# Altium PCB Lora_PCB.PcbDoc
Units mm, origin at the board's own origin, x right, y up, seen from the top; angles counter-clockwise.
Board outline 87.88 x 21.08 mm, 2 copper layers (Top Layer, Bottom Layer); 30 components, 40 nets, 129 pads, 4 vias.
Unrouted connection lines stored in the file: 50.
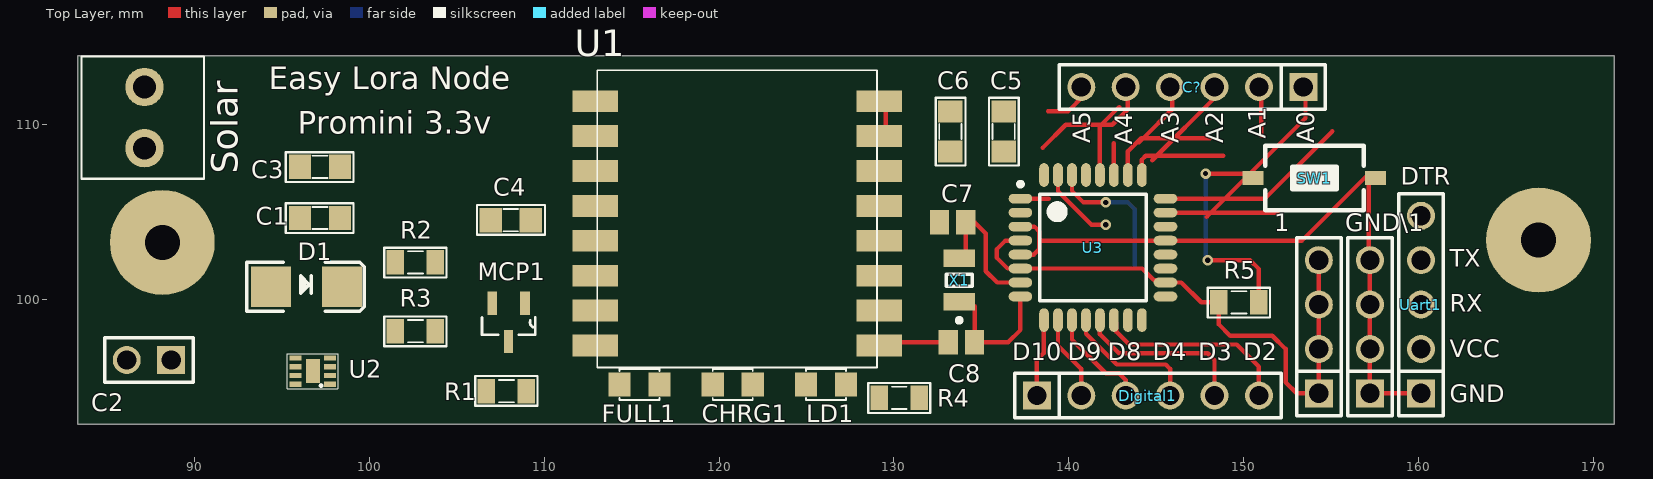
[diagram p0: Top Layer view]
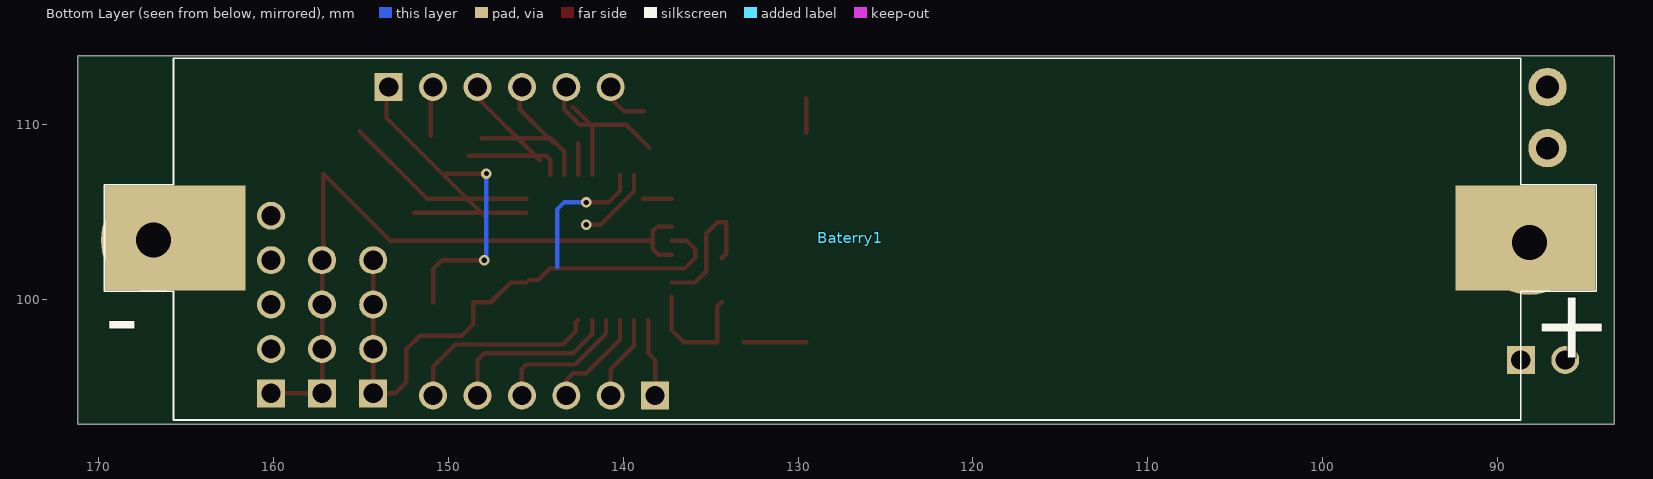
[diagram p1: Bottom Layer view, seen from below]

## Layer stack, top to bottom
Top Solder: solder mask 0.0102, Solder Resist, Dk 3.5
Top Layer: signal copper 0.0356
Dielectric 1: dielectric 0.32, FR-4, Dk 4.8
Bottom Layer: signal copper 0.0356
Bottom Solder: solder mask 0.0102, Solder Resist, Dk 3.5

## Board outline
83.312,92.837 171.196,92.837 171.196,113.919 83.312,113.919

## Design rules (kind name [scope] priority, off if disabled: settings)
Clearance [All] p1: gap=0.254 ignorepadtopadclearanceinfootprint=FALSE except(0: Arc-Hole Track-Hole SMDPad-Hole THPad-Hole Via-Hole Fill-Hole Poly-Hole Region-Hole Text-Hole)
PolygonConnect [All] p1: connectstyle=Relief reliefconductorwidth=0.254 reliefentries=4 polygonreliefangle="90 Angle" airgapwidth=0.254
RoomDefinition Schematic [InComponentClass('Schematic')] p1: confinementstyle=ConfineIn formatcopy=TRUE lockcomponents=FALSE outline 0,0 50.8,0 50.8,25.4 0,25.4
RoutingVias [All] p1: holewidth=0.3 width=0.6 viastyle="Through Hole" minholewidth=0.3 minwidth=0.6 maxholewidth=0.3 maxwidth=0.6
SolderMaskExpansion [All] p1: expansion=0.102
Width [All] p1: maxlimit=0.254 minlimit=0.254 preferedwidth=0.254
30 further rules are at their usual default settings.

## Components (designator, comment, footprint, x,y, rotation, side; value= is the part's Value field where it differs from the comment)
1 "JP4" JP4-D1T 154.305,94.615 r90 top
Baterry1 "18650 Baterry" "18650 Baterry" 88.646,113.792 r0 bottom
C1 "22uF" CAP_0805 97.155,104.648 r0 top value=33p
C2 "JP2" JP2-D1T 88.646,96.52 r180 top
C3 "4.7uF" CAP_0805 97.155,107.569 r0 top value=33p
C4 "1uF" CAP_0805 108.077,104.521 r180 top value=33p
C5 "0.1uF" CAP_0805 136.271,109.601 r90 top
C6 "0.1uF" CAP_0805 133.223,109.601 r90 top value=33p
C7 "100pF" C0805 133.35,104.394 r180 top value=33p
C8 "100pF" C0805 133.858,97.536 r180 top value=33p
C? "JP6" JP6-D1T 153.416,112.141 r180 top
CHRG1 "LED" LED-0805-Red 121.92,95.123 r180 top value="LED 3 - 5 ly 2 Colour"
D1 "S1g" DIO-SMD-106 96.393,100.711 r180 top value=1N5007
Digital1 "JP6" JP6-D1T 138.176,94.488 r0 top
FULL1 "LED" LED-0805-Blue 116.586,95.123 r180 top value="LED 3 - 5 ly 2 Colour"
GND\1 "JP4" JP4-D1T 157.226,94.615 r90 top
LD1 "LED" LED-0805-Yellow 124.968,95.123 r0 top value="LED 3 - 5 ly 2 Colour"
MCP1 "MCP1700T" SOT23-3 107.95,98.679 r270 top
R1 "0.33k" RES-SMD-0805 107.823,94.742 r180 top
R2 "8.2K" RES-SMD-0805 102.616,102.108 r0 top
R3 "2k" RES-SMD-0805 102.616,98.171 r0 top
R4 "1K" RES-SMD-0805 130.302,94.361 r0 top
R5 "10K" RES-SMD-0805 149.733,99.822 r0 top
Solar "KF2" KF2-3.5 87.122,110.391 r270 top (schematic designator Solar1)
SW1 "SW" SW1-SMD 154.051,106.934 r180 top value="SW chip 2 pin"
U1 "Lora Ra-02" Ra-02 121.031,104.594 r0 top
U2 "CN3056" DFN-8 96.748,95.889 r90 top
U3 "ATmega328-AU" TQFP32 141.383,102.956 r0 top
Uart1 "JP5" JP5-D1T 160.147,94.615 r90 top
X1 "8Mhz" XT2-32.768KHz-2_V 133.731,101.092 r90 top value=4Mhz

## Footprints (in the part's own frame and the unit in brackets; to place one, negate y for a bottom-side part, rotate by r counter-clockwise, add the part's x,y. Pads: shape width x height; smd on the part's side, far side on the other; paste and mask are expansions set on the pad)
"18650 Baterry" [mm]
  rect 8x6 smd: 1(-0.254,10.287) 2(76.962,10.287)
  silkscreen extent -4.32,0 81.03,20.7, body extent 0,0 77.05,20.65, height 17.36
C0805 [mm] "Chip Capacitor, Body 2.0x1.3mm, IPC High Density"
  rect 1.1x1.4 smd: 1(-0.75,0) 2(0.75,0)
  body extent -1.1,-0.72 1.1,0.72, height 1.4
CAP_0805 [mil] "Compoment SMD 80x50mil"
  rect 50x55 smd: 1(-45,0) 2(45,0)
  silkscreen extent -77,-34 76,33, body extent -39,-25 39,24, height 31
DFN-8 [mm]
  rect 0.3x0.7 smd: 1(-0.75,-0.99) 2(-0.25,-0.99) 3(0.25,-0.99) 4(0.75,-0.99) 5(0.75,0.99) 6(0.25,0.99) 7(-0.25,0.99) 8(-0.75,0.99)
  rect 1.38x0.8 smd: Heat(0,0)
  silkscreen extent -1,-1.45 1,1.45, body extent -0.99,-1.45 1.01,1.59, height 0.9
DIO-SMD-106 [mil]
  rect 90x90.55 smd: 1(80,0) 2(-80,0)
  silkscreen extent -130,-55 135,55, body extent -99,-50 106,52, height 95
JP2-D1T [mm] "2 pins, 1 row, straight, gold plating"
  rect 1.6x1.6 hole 1.1: 1(0,0)
  round 1.6 hole 1.1: 2(2.54,0)
  silkscreen extent -1.27,-1.27 3.81,1.27, body extent -1.27,-1.27 3.81,1.27, height 8.54
JP4-D1T [mm] "4 pins, 1 row, straight, gold plating"
  rect 1.6x1.6 hole 1.1: 1(0,0)
  round 1.6 hole 1.1: 2(2.54,0) 3(5.08,0) 4(7.62,0)
  silkscreen extent -1.27,-1.27 8.89,1.27, body extent -1.27,-1.27 8.89,1.27, height 8.54
JP5-D1T [mm] "5 pins, 1 row, straight, gold plating"
  rect 1.6x1.6 hole 1.1: 1(0,0)
  round 1.6 hole 1.1: 2(2.54,0) 3(5.08,0) 4(7.62,0) 5(10.16,0)
  silkscreen extent -1.27,-1.27 11.43,1.27, body extent -1.27,-1.27 11.43,1.27, height 8.54
JP6-D1T [mm] "6 pins, 1 row, straight, gold plating"
  rect 1.6x1.6 hole 1.1: 1(0,0)
  round 1.6 hole 1.1: 2(2.54,0) 3(5.08,0) 4(7.62,0) 5(10.16,0) 6(12.7,0)
  silkscreen extent -1.27,-1.27 13.97,1.27, body extent -1.27,-1.27 13.97,1.27, height 8.54
KF2-3.5 [mm] "3,50mm - modular - blue - Horizontal wire entry - Pressure clamp - 8,4mm height - 02p"
  round 2.2 hole 1.3: 1(-1.75,0) 2(1.75,0)
  silkscreen extent -3.5,-3.6 3.5,3.4, body extent -3.95,-3.6 4.05,3.4, height 8.41
LED-0805-Blue [mil]
  rect 50x55 smd: 1(0,0) 2(90,0)
  silkscreen extent 0,-35 90,35, body extent 5,-25 85,25, height 43
LED-0805-Red [mil]
  rect 50x55 smd: 1(0,0) 2(90,0)
  silkscreen extent 0,-35 90,35, body extent 5,-25 85,25, height 43
LED-0805-Yellow [mil]
  rect 50x55 smd: 1(0,0) 2(90,0)
  silkscreen extent 0,-35 90,35, body extent 5,-25 85,25, height 43
Ra-02 [mm]
  rect 2.6x1.25 smd: 1(-8.128,6.731) 2(-8.128,4.735) 3(-8.128,2.74) 4(-8.128,0.744) 5(-8.128,-1.252) 6(-8.128,-3.248) 7(-8.128,-5.243) 8(-8.128,-7.239) 9(8.128,-7.239) 10(8.128,-5.243) 11(8.128,-3.248) 12(8.128,-1.252) 13(8.128,0.744) 14(8.128,2.74) 15(8.128,4.735) 16(8.128,6.731)
  silkscreen extent -8,-8.51 8,8.51, body extent -8,-8.76 8,8.24, height 3.2
RES-SMD-0805 [mil]
  rect 39.37x55 smd: 1(-45,0) 2(45,0)
  silkscreen extent -70,-34 70,33, body extent -39,-25 39,25, height 31
SOT23-3 [mil]
  rect 52x22 smd: 1(-43,37) 2(-43,-37)
  rect 52x20 smd: 3(43,0)
  silkscreen extent -11,-60 28,60, body extent -45,-57 52,57, height 37
SW1-SMD [mm]
  rect 1.2x0.8 smd: 1(-3.5,0) 2(3.5,0)
  silkscreen extent -2.82,-1.85 2.82,1.85, body extent -3.05,-1.85 3.05,1.85, height 2.5
TQFP32 [mm] "Thin QFP, 32-Leads, Body 9x9mm, Pitch 0.8mm, IPC Low Density"
  oval 1.35x0.55 smd: 1(-4.15,2.8) 2(-4.15,2) 3(-4.15,1.2) 4(-4.15,0.4) 5(-4.15,-0.4) 6(-4.15,-1.2) 7(-4.15,-2) 8(-4.15,-2.8) 17(4.15,-2.8) 18(4.15,-2) 19(4.15,-1.2) 20(4.15,-0.4) 21(4.15,0.4) 22(4.15,1.2) 23(4.15,2) 24(4.15,2.8)
  oval 0.55x1.35 smd: 9(-2.8,-4.15) 10(-2,-4.15) 11(-1.2,-4.15) 12(-0.4,-4.15) 13(0.4,-4.15) 14(1.2,-4.15) 15(2,-4.15) 16(2.8,-4.15) 25(2.8,4.15) 26(2,4.15) 27(1.2,4.15) 28(0.4,4.15) 29(-0.4,4.15) 30(-1.2,4.15) 31(-2,4.15) 32(-2.8,4.15)
  silkscreen extent -4.27,-3.05 3.05,3.75, body extent -4.5,-4.5 4.5,4.5, height 1.4
XT2-32.768KHz-2_V [mm] "Hand Drawn, 2-Leads, Body 3.2x1.5mm, Pitch 2.5mm"
  rect 1x1.8 smd: 1(-1.25,0) 2(1.25,0)
  silkscreen extent -2.43,-0.75 0.35,0.75, body extent -1.6,-0.75 1.6,0.75, height 0.9

## Part data
1 GND\1: "WR-PHD 2.54 mm Angled Socket Header", Manufacturer="Würth Elektronik eiSos GmbH", partNo=613004143121, ComponentLink1 Description=Manufacturer, ComponentLink1URL=http://www.we-online.com, ComponentLink2 Description=Datasheet, ComponentLink2URL=http://katalog.we-online.de/em/datasheet/6130xx143121.pdf, Created by="Karrer Zheng", Created Date="29 March 2013", NoPins=04
C1 C3 C4 C6 C7 C8: library part CapSMD, "Capacitor", LatestRevisionDate=17-Jul-2002, LatestRevisionNote="Re-released for DXP Platform.", PackageReference=RAD-0.3, Published=8-Jun-2000, Publisher="Altium Limited"
C2: "WR-PHD 2.54 mm Angled Socket Header", Manufacturer="Würth Elektronik eiSos GmbH", partNo=613002143121, ComponentLink1 Description=Manufacturer, ComponentLink1URL=http://www.we-online.com, ComponentLink2 Description=Datasheet, ComponentLink2URL=http://katalog.we-online.de/em/datasheet/6130xx143121.pdf, Created by="Karrer Zheng", Created Date="29 March 2013", NoPins=02
C5: library part "C104 SMD", "0603 SMD CAP"
C? Digital1: "WR-PHD 2.54 mm Angled Socket Header", Manufacturer="Würth Elektronik eiSos GmbH", partNo=613006143121, ComponentLink1 Description=Manufacturer, ComponentLink1URL=http://www.we-online.com, ComponentLink2 Description=Datasheet, ComponentLink2URL=http://katalog.we-online.de/em/datasheet/6130xx143121.pdf, Created by="Karrer Zheng", Created Date="29 March 2013", NoPins=06
CHRG1 FULL1 LD1: library part "LED SMD"
D1: library part "Diode SMD", "Default Diode", Code - JEDEC=DO-214-AB, Published=8-Jun-2000, Publisher="Altium Limited", Revision="July-2002: Re-released for DXP Platform."
R1 R2 R3 R4 R5: library part Res-SMD, "Resistor", Manufacturer="Generic Components", Class=Passive, Published=08/06/2000, Publisher="Altium Hobart Technology Centre"
Solar: Manufacturer="Würth Elektronik eiSos GmbH", partNo=691103110002, ComponentLink1 Description=Manufacturer, ComponentLink1URL=http://www.we-online.com, ComponentLink2 Description=Datasheet, ComponentLink2URL=http://katalog.we-online.de/em/datasheet/6911031100xx.pdf, Created by="Karrer Zheng", Created Date="29 October 2013", NoPins=2
SW1: library part SW2, "Switch button 2 pin"
U3: "8-bit AVR Microcontroller, 32KB Flash, 1KB EEPROM, 2KB SRAM, 32-pin TQFP, Industrial Grade (-40癈 to 85癈)", Supplier Part Number 1=ATMEGA328-AU-ND, Code_JEDEC=MS-026-ABA, ComponentLink1Description="Manufacturer Link", ComponentLink1URL=http://www.atmel.com/products/avr/default.asp?, ComponentLink2Description="ATmega48A/48PA/88A/88PA/168A/168PA/328/328P Datasheet", ComponentLink2URL=http://www.atmel.com/dyn/resources/prod_documents/8271.pdf, ComponentLink3Description="ATmega48A/48PA/88A/88PA/168A/168PA/328/328P Summary", ComponentLink3URL=http://www.atmel.com/dyn/resources/prod_documents/8271S.pdf, ComponentLink4Description="Atmel.com Home", ComponentLink4URL=http://www.atmel.com, DatasheetVersion="revA, Jan-2010", PackageDescription="32-Lead, 7x7x1.0 mm Body, 0.8mm Lead Pitch, Thin Profile Plastic Quad Flat Package (TQFP)", PackageReference=32A, PackageVersion="revB, Oct-2001", Published=1-Apr-2010, Publisher="Altium Limited", Supplier 1=Digi-Key, Supplier 2=Mouser, Supplier Part Number 2=556-ATMEGA328-AU
Uart1: "WR-PHD 2.54 mm Angled Socket Header", Manufacturer="Würth Elektronik eiSos GmbH", partNo=613005143121, ComponentLink1 Description=Manufacturer, ComponentLink1URL=http://www.we-online.com, ComponentLink2 Description=Datasheet, ComponentLink2URL=http://katalog.we-online.de/em/datasheet/6130xx143121.pdf, Created by="Karrer Zheng", Created Date="29 March 2013", NoPins=05
X1: library part XT2, "Crystal, 32.768 KHz, -40 to 85 degC, 3.2 x 1.5 x 0.9 mm SMD"

## Free pads (board coordinates)
  round 6 hole 2: 3(88.138,103.251) 4(166.878,103.378)

## Via types
v1: diameter 0.6, hole 0.3, Top Layer to Bottom Layer, 4 vias

## Nets (pads, with @x,y where several pads share a name; then routed paths per layer and width w, separated by ;. In a path a pad name is that pad's centre, name@x,y a point inside that pad or via, vN(x,y) a via of type N, cw(c..) or ccw(c..) an arc to the next point about the centre after c; other vN are vias at no path point)
3.3v: 1.1 1.2 1.3 1.4 C4.2 MCP1.2 R5.1 U1.3 U3.4 U3.6 U3.18 | length 33.2
  Top Layer w0.254: U3.4 136.376,103.356 135.89,102.87 135.89,102.362 136.496,101.756 U3.6 144.205,101.756 144.861,101.1 145.389,101.1 U3.18 146.44,100.956 147.574,99.822 R5.1 148.59,98.552 149.225,97.917 151.638,97.917 152.4,97.155 152.4,95.25 153.035,94.615 1.1 1.2 1.3 1.4
A0: C?.1 U3.23 | length 16.3
  Top Layer w0.254: U3.23 148.136,104.956 ; 147.882,104.702 148.136,104.956 ; 151.946,104.956 148.136,104.956 ; C?.1@153.543,112.268 153.543,110.363 148.136,104.956
A1: C?.2 U3.24 | length 14
  Top Layer w0.254: U3.24 151.222,105.756 155.067,109.601 ; 151.003,109.347 C?.2@151.003,112.268
A2: C?.3 U3.25 | length 11.5
  Top Layer w0.254: U3.25 144.183,107.988 144.399,108.204 145.034,108.204 ; 144.78,107.95 145.034,108.204 ; C?.3@148.463,112.268 C?.3 148.336,111.506 145.034,108.204 ; 148.844,108.204 145.034,108.204
A3: C?.4 U3.26 | length 10.5
  Top Layer w0.254: U3.26 143.383,108.458 144.145,109.22 144.272,109.22 ; 144.018,108.966 144.272,109.22 ; C?.4@145.923,112.268 145.923,110.871 144.272,109.22 ; 148.082,109.22 144.272,109.22
A4: C?.5 U3.27 | length 9
  Top Layer w0.254: 138.519,108.674 139.827,109.982 142.494,109.982 143.383,110.871 C?.5@143.383,112.268 ; U3.27 142.583,108.928
A5: C?.6 U3.28 | length 7.4
  Top Layer w0.254: 138.811,110.744 139.954,110.744 140.843,111.633 C?.6@140.843,112.268 ; U3.28 141.783,109.906 142.875,110.998
A6: U3.19
A7: U3.22
ARCF: C6.2 U3.20
D2: U3.32
D3: U1.4 U3.1 | length 1.6
  Top Layer w0.254: U3.1 138.846,105.756
D4: U1.5 U3.2
D5: Digital1.1 R4.2 U3.9 | length 4.5
  Top Layer w0.254: Digital1.1 138.176,96.52 138.557,96.901 138.557,98.78 U3.9
D6: Digital1.2 U3.10 | length 4.9
  Top Layer w0.254: U3.10 139.383,97.345 140.716,96.012 Digital1.2
D7: Digital1.3 U3.11 | length 6
  Top Layer w0.254: U3.11 140.183,97.688 142.113,95.758 142.875,95.758 143.256,95.377 Digital1.3
D8: Digital1.4 U3.12 | length 7.9
  Top Layer w0.254: U3.12 140.983,98.031 142.748,96.266 145.542,96.266 145.796,96.012 Digital1.4
D9: Digital1.5 U3.13 | length 10
  Top Layer w0.254: U3.13 141.783,97.993 142.875,96.901 147.955,96.901 148.336,96.52 Digital1.5
D10: Digital1.6 U3.14 | length 11.4
  Top Layer w0.254: U3.14 142.727,98.662 142.727,98.134 143.452,97.409 149.606,97.409 150.876,96.139 Digital1.6
DTR: C5.2 Uart1.5
GND: Baterry1.2 C1.2 C3.1 C4.1 C6.1 C7.2 C8.2 GND\1.1 GND\1.2 GND\1.3 GND\1.4 LD1.2 MCP1.1 pad.4 R3.2 Solar.2 SW1.1 U1.1 U1.2 U1.9 U1.15 U1.16 U2.1 U2.3 U3.3 U3.5 U3.21 Uart1.1 | length 45
  Top Layer w0.254: U1.9@129.54,97.536 C8.2 ; U1.15@129.54,109.51 U1.16@129.54,111.506 ; U3.5 137.989,102.556 138.303,102.87 138.303,103.251 ; U3.3@137.249,104.14 U3.3 138.033,104.156 138.303,103.886 138.303,103.251 ; Uart1.1 GND\1.1 GND\1.2 GND\1.3 GND\1.4 157.17,102.291 157.17,107.188 153.338,103.356 U3.21 138.408,103.356 138.303,103.251
MISO: U1.13 U3.16
MOSI: U1.14 U3.15
NetBaterry1_1: Baterry1.1 C2.2 C3.2 pad.3 R2.1 U2.5
NetC1_1: C1.1 D1.1 R1.2 Solar.1
NetC7_1: C7.1 U3.7 X1.2 | length 8
  Top Layer w0.254: X1.2@134.366,102.342 134.1,102.608 C7.1 134.62,104.394 135.255,103.759 135.255,101.6 135.899,100.956 U3.7
NetC8_1: C8.1 U3.8 X1.1 | length 7.2
  Top Layer w0.254: X1.1@134.366,99.842 134.608,99.6 C8.1 136.525,97.536 137.233,98.244 U3.8
NetCHRG1_1: CHRG1.1 FULL1.1 R1.1
NetCHRG1_2: CHRG1.2 U2.7
NetD1_2: D1.2 U2.4
NetFULL1_2: FULL1.2 U2.6
NetLD1_1: LD1.1 R4.1
NetR2_2: R2.2 U2.8
NetR3_1: R3.1 U2.2
RAW: C2.1 MCP1.3
RESET: C5.1 R5.2 SW1.2 U3.29 | length 12.4
  Top Layer w0.254: v1(147.828,107.188) SW1.2@150.17,107.188 ; v1(147.955,102.235) 150.368,102.235 150.876,101.727 R5.2
  Bottom Layer w0.254: v1(147.828,107.188) 147.828,102.362 v1(147.955,102.235)
RXI: U3.30 Uart1.3 | length 8.2
  Top Layer w0.254: U3.30 140.183,106.197 140.843,105.537 v1(142.113,105.537)
  Bottom Layer w0.254: v1(142.113,105.537) 143.383,105.537 143.764,105.156 143.764,101.854
SCK: U1.12 U3.17
TXO: U3.31 Uart1.4 | length 4.4
  Top Layer w0.254: U3.31 139.383,106.182 141.298,104.267 v1(142.113,104.267)
VCC: Uart1.2
pads on no net: U1.6 U1.7 U1.8 U1.10 U1.11 U2.Heat

## Silkscreen, mask and mechanical layers (free items; w line width, h text height)
Top Overlay:
  text "Easy Lora Node" at 94.234,112.014 h1.3
  text "Promini 3.3v" at 95.885,109.474 h1.3
  text "A1" at 151.257,109.172 h1 r90
  text "A5" at 141.224,108.934 h1 r90
  text "A3" at 146.279,108.934 h1 r90
  text "A2" at 148.844,108.934 h1 r90
  text "A0" at 154.051,108.934 h1 r90
  text "A4" at 143.637,108.839 h1 r90
  text "DTR" at 159.004,106.553 h1
  text "TX" at 161.798,101.854 h1
  text "RX" at 161.798,99.272 h1
  text "VCC" at 161.798,96.689 h1
  text "D10" at 136.779,96.52 h1
  text "D9" at 139.954,96.52 h1
  text "D8" at 142.215,96.52 h1
  text "D4" at 144.805,96.52 h1
  text "D3" at 147.396,96.52 h1
  text "D2" at 149.987,96.52 h1
  text "GND" at 161.798,94.107 h1

## Text inside footprints (layer, text, board x,y; h text height)
Baterry1: Bottom Overlay "+" at 88.011,96.647 h4; Bottom Overlay "-" at 169.672,97.028 h4